# Altium PCB accel_draft.PcbDoc
Units mm, origin at the board's own origin, x right, y up, seen from the top; angles counter-clockwise.
Board outline 17.14 x 11.68 mm, 2 copper layers (Top Layer, Bottom Layer); 4 components, 76 nets, 28 pads, 0 vias.
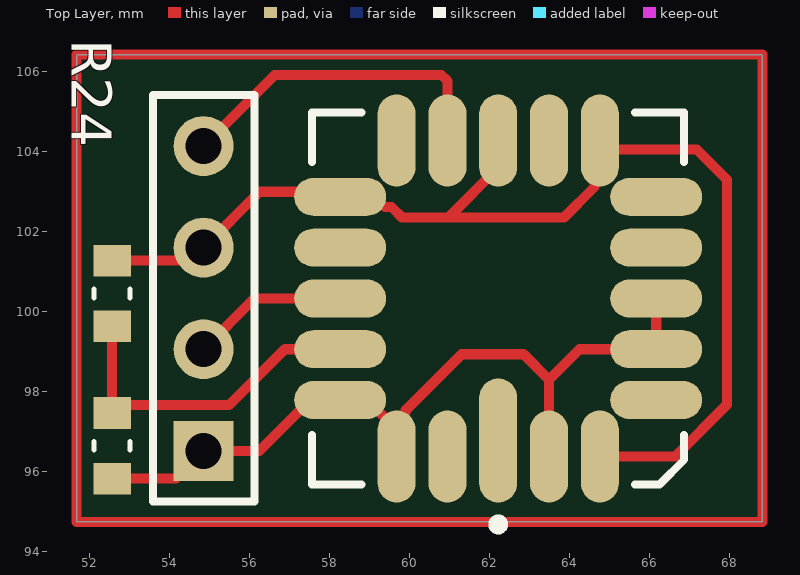
[diagram p0: Top Layer view]
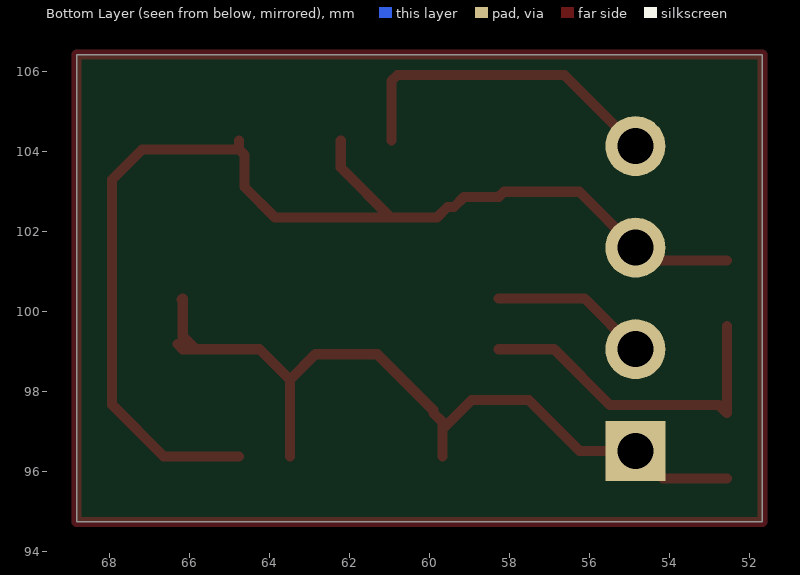
[diagram p1: Bottom Layer view, seen from below]
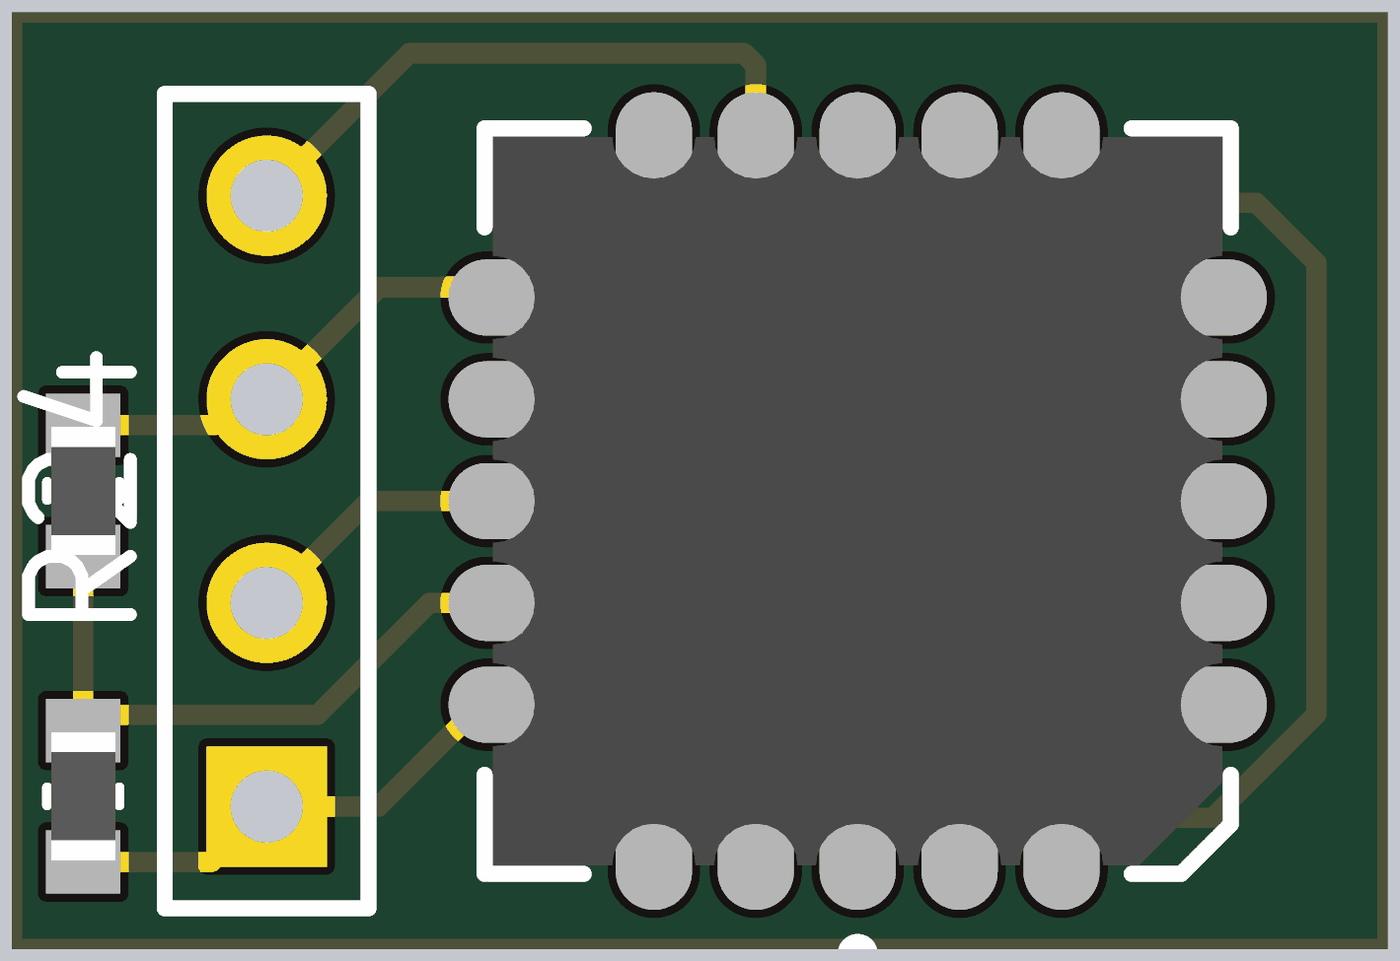
[diagram p2: 3D render of the assembled board from above, using the file's embedded part models]

## Layer stack, top to bottom
Top Solder: solder mask 0.0102, Solder Resist, Dk 3.5
Top Layer: signal copper 0.0356
Dielectric 1: dielectric 0.32, FR-4, Dk 4.8
Bottom Layer: signal copper 0.0356
Bottom Solder: solder mask 0.0102, Solder Resist, Dk 3.5

## Board outline
51.689,94.742 51.689,106.426 68.834,106.426 68.834,94.742

## Design rules (kind name [scope] priority, off if disabled: settings)
Clearance [All] p1: gap=0.254 ignorepadtopadclearanceinfootprint=TRUE except(0: Arc-Hole Track-Hole SMDPad-Hole THPad-Hole Via-Hole Fill-Hole Poly-Hole Region-Hole Text-Hole)
MinimumSolderMaskSliver [All] p1: minsoldermaskwidth=0.1
PolygonConnect [All] p1: connectstyle=Relief reliefconductorwidth=0.254 reliefentries=4 polygonreliefangle="90 Angle" airgapwidth=0.254
RoutingVias [All] p1: holewidth=0.711 width=1.27 viastyle="Through Hole" minholewidth=0.711 minwidth=1.27 maxholewidth=0.711 maxwidth=1.27
SilkToSolderMaskClearance [IsPad] p1: minsilkscreentomaskgap=0.2 clearancetoexposedcopper=TRUE
SolderMaskExpansion [All] p1: expansion=0.102 istentingtop=FALSE
Width [All] p1: maxlimit=0.254 minlimit=0.254 preferedwidth=0.254
28 further rules are at their usual default settings.

## Classes and differential pairs
component class accel: R24

## Components (designator, comment, footprint, x,y, rotation, side; value= is the part's Value field where it differs from the comment)
*1 "SI1521L" LCC127P889X889X254-20N 62.23,100.33 r180 top
P20 "Header 4" HDR1X4 54.864,96.52 r90 top
R23 "2k" RESC1608X55N 52.578,96.647 r270 top
R24 "2k" RESC1608X55N 52.578,100.457 r90 top

## Footprints (in the part's own frame and the unit in brackets; to place one, negate y for a bottom-side part, rotate by r counter-clockwise, add the part's x,y. Pads: shape width x height; smd on the part's side, far side on the other; paste and mask are expansions set on the pad)
HDR1X4 [mm] "Connector; Header; 4 Position"
  rect 1.5x1.5 hole 0.9: 1(0,0)
  round 1.5 hole 0.9: 2(2.54,0) 3(5.08,0) 4(7.62,0)
  silkscreen extent -1.27,-1.27 8.89,1.27
LCC127P889X889X254-20N [mm] "LCC, 20-Pins, Body 8.89x8.89mmx2.54mm, Pitch 1.27mm, IPC Medium Density"
  oval 0.95x3.1 smd: 1(0,3.55)
  oval 0.95x2.3 smd: 2(-1.27,3.95) 3(-2.54,3.95) 9(-2.54,-3.95) 10(-1.27,-3.95) 11(0,-3.95) 12(1.27,-3.95) 13(2.54,-3.95) 19(2.54,3.95) 20(1.27,3.95)
  oval 2.3x0.95 smd: 4(-3.95,2.54) 5(-3.95,1.27) 6(-3.95,0) 7(-3.95,-1.27) 8(-3.95,-2.54) 14(3.95,-2.54) 15(3.95,-1.27) 16(3.95,0) 17(3.95,1.27) 18(3.95,2.54)
  silkscreen extent -4.65,-4.65 4.65,5.77, body extent -4.54,-4.54 4.54,4.54, height 2.54
RESC1608X55N [mm]
  rect 0.79x0.93 smd: 1(-0.82,0) 2(0.82,0)
  silkscreen extent -0.11,-0.45 0.11,0.45, body extent -0.8,-0.4 0.8,0.4, height 0.55

## Part data
*1: library part CMP-010-00024-1, "Silicon Design SI-1521L-002 +- 2g LCC-20 Surface mount accelerometer"
P20: "Header, 4-Pin", LatestRevisionDate=17-Jul-2002, LatestRevisionNote="Re-released for DXP Platform.", Publisher="Altium Limited"
R23 R24: library part RT0603BRD0733RL, "RES SMD 33 OHM 0.1% 1/10W 0603", Package=None, Availability=Unavailable, MF="{'manufacturer': u'Yageo'}", MP=RT0603BRD0733RL, Price=None

## Nets (pads, with @x,y where several pads share a name; then routed paths per layer and width w, separated by ;. In a path a pad name is that pad's centre, name@x,y a point inside that pad or via, vN(x,y) a via of type N, cw(c..) or ccw(c..) an arc to the next point about the centre after c; other vN are vias at no path point)
5V: 
"5V ref": *1.3 *1.9 *1.11 *1.14 P20.3 R24.2 | length 31
  Top Layer w0.254: R24.2 54.204,101.277 54.527,101.6 P20.3 56.261,102.997 *1.14@58.147,102.997 ; 57.019,103.003 58.147,103.003 *1.14 59.143,102.87 59.397,102.616 59.563,102.616 59.828,102.351 60.976,102.351 ; *1.11 62.23,103.605 60.976,102.351 ; *1.3 66.656,96.38 67.945,97.669 67.945,103.305 67.196,104.054 *1.9@64.77,104.054 ; *1.9 *1.9@64.77,104.054 ; 60.976,102.351 63.87,102.351 64.637,103.118 64.637,103.92 *1.9@64.77,104.054
12V: 
A: 
AIN0+: 
AIN0-: 
AIN1+: 
AIN1-: 
AIN2+: 
AIN2-: 
AIN3+: 
AIN3-: 
AON: *1.16 P20.2 | length 3.9
  Top Layer w0.254: P20.2 56.134,100.33 *1.16
AOP: *1.12 P20.4 | length 8.4
  Top Layer w0.254: P20.4 56.642,105.918 60.811,105.918 60.96,105.769 *1.12
B: 
CS: 
DCLK: 
DOUT0: 
DOUT1: 
DOUT2: 
DOUT3: 
DRDY: 
GND: *1.2 *1.5 *1.6 *1.18 *1.19 P20.1 R23.2 | length 20.4
  Top Layer w0.254: R23.2 54.171,95.827 P20.1 56.261,96.52 57.531,97.79 58.955,97.79 *1.19@59.69,97.055 ; *1.19 *1.19@59.69,97.055 ; *1.2 63.5,98.298 ; *1.6@66.204,100.306 *1.6 66.18,99.382 *1.5@65.858,99.06 ; *1.5@66.313,99.193 *1.5 *1.5@65.858,99.06 ; *1.19@59.69,97.055 59.69,97.243 59.914,97.468 59.914,97.533 61.314,98.933 62.865,98.933 63.5,98.298 ; 63.5,98.298 64.262,99.06 *1.5@65.858,99.06
IN0+: 
IN0-: 
IN1+: 
IN1-: 
IN2+: 
IN2-: 
IN3+: 
IN3-: 
MODE: 
Net1_1: 
Net2_1: 
Net2_2: 
Net*1_17: *1.17 R23.1 R24.1 | length 8.5
  Top Layer w0.254: R24.1 R23.1 52.774,97.663 55.499,97.663 56.896,99.06 *1.17
Net_1: 
NetC12_2: 
NetC13_2: 
NetC16_2: 
NetC17_2: 
NetC31_2: 
NetC32_2: 
NetC33_2: 
NetC34_2: 
NetC37_2: 
NetC38_2: 
NetC39_2: 
NetC40_2: 
NetP11_1: 
NetP11_2: 
NetP11_3: 
NetP11_4: 
NetR2_1: 
NetR3_1: 
NetR5_1: 
NetR6_1: 
NetR9_1: 
NetR10_1: 
NetR14_1: 
NetR15_1: 
NetR17_1: 
NetR18_1: 
NetR22_2: 
NetSW1_4: 
NetU1_32: 
RS485RX: 
RS485TX: 
SCLK: 
SDI: 
SDO: 
START: 
SYNC: 
V3ref: 
V4ref: 
VCM: 
pads on no net: *1.1 *1.4 *1.7 *1.8 *1.10 *1.13 *1.15 *1.20
copper on no net: | length 57.7
  Top Layer w0.254: 51.689,94.742 68.834,94.742 68.834,106.426 51.689,106.426 51.689,94.742

## Dimensions
51.689,106.426 to 51.689,94.742 on Top Layer
51.689,106.426 to 68.834,106.426 on Top Layer